# Altium PCB 智能插座2019_4_12.PcbDoc
Units mm, origin at the board's own origin, x right, y up, seen from the top; angles counter-clockwise.
Board outline 80 x 78.47 mm, 2 copper layers (Top Layer, Bottom Layer); 84 components, 62 nets, 274 pads, 96 vias.
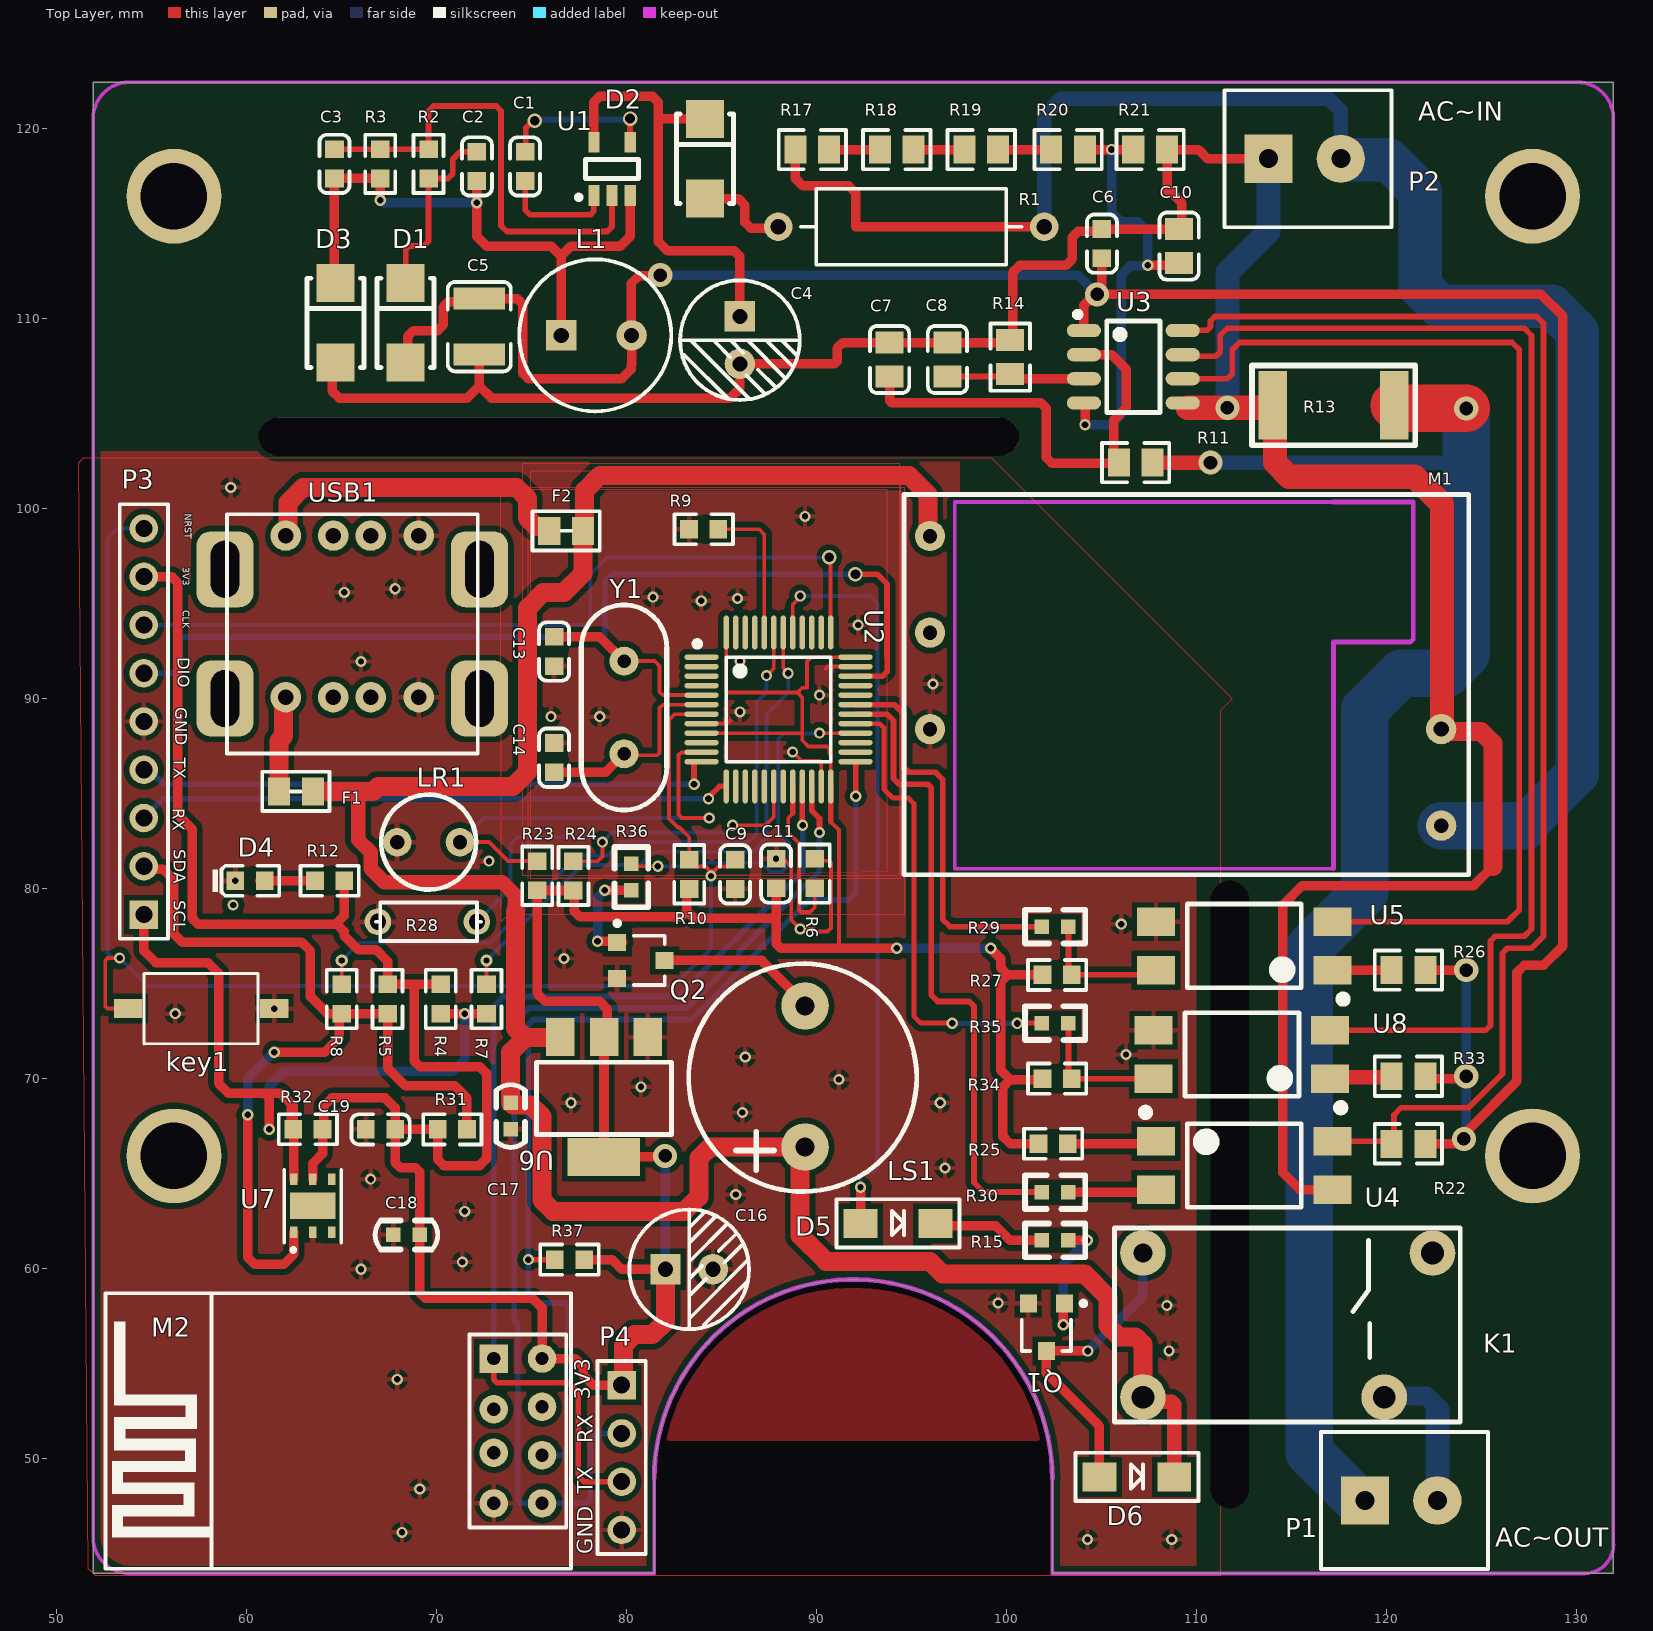
[diagram p0: Top Layer view]
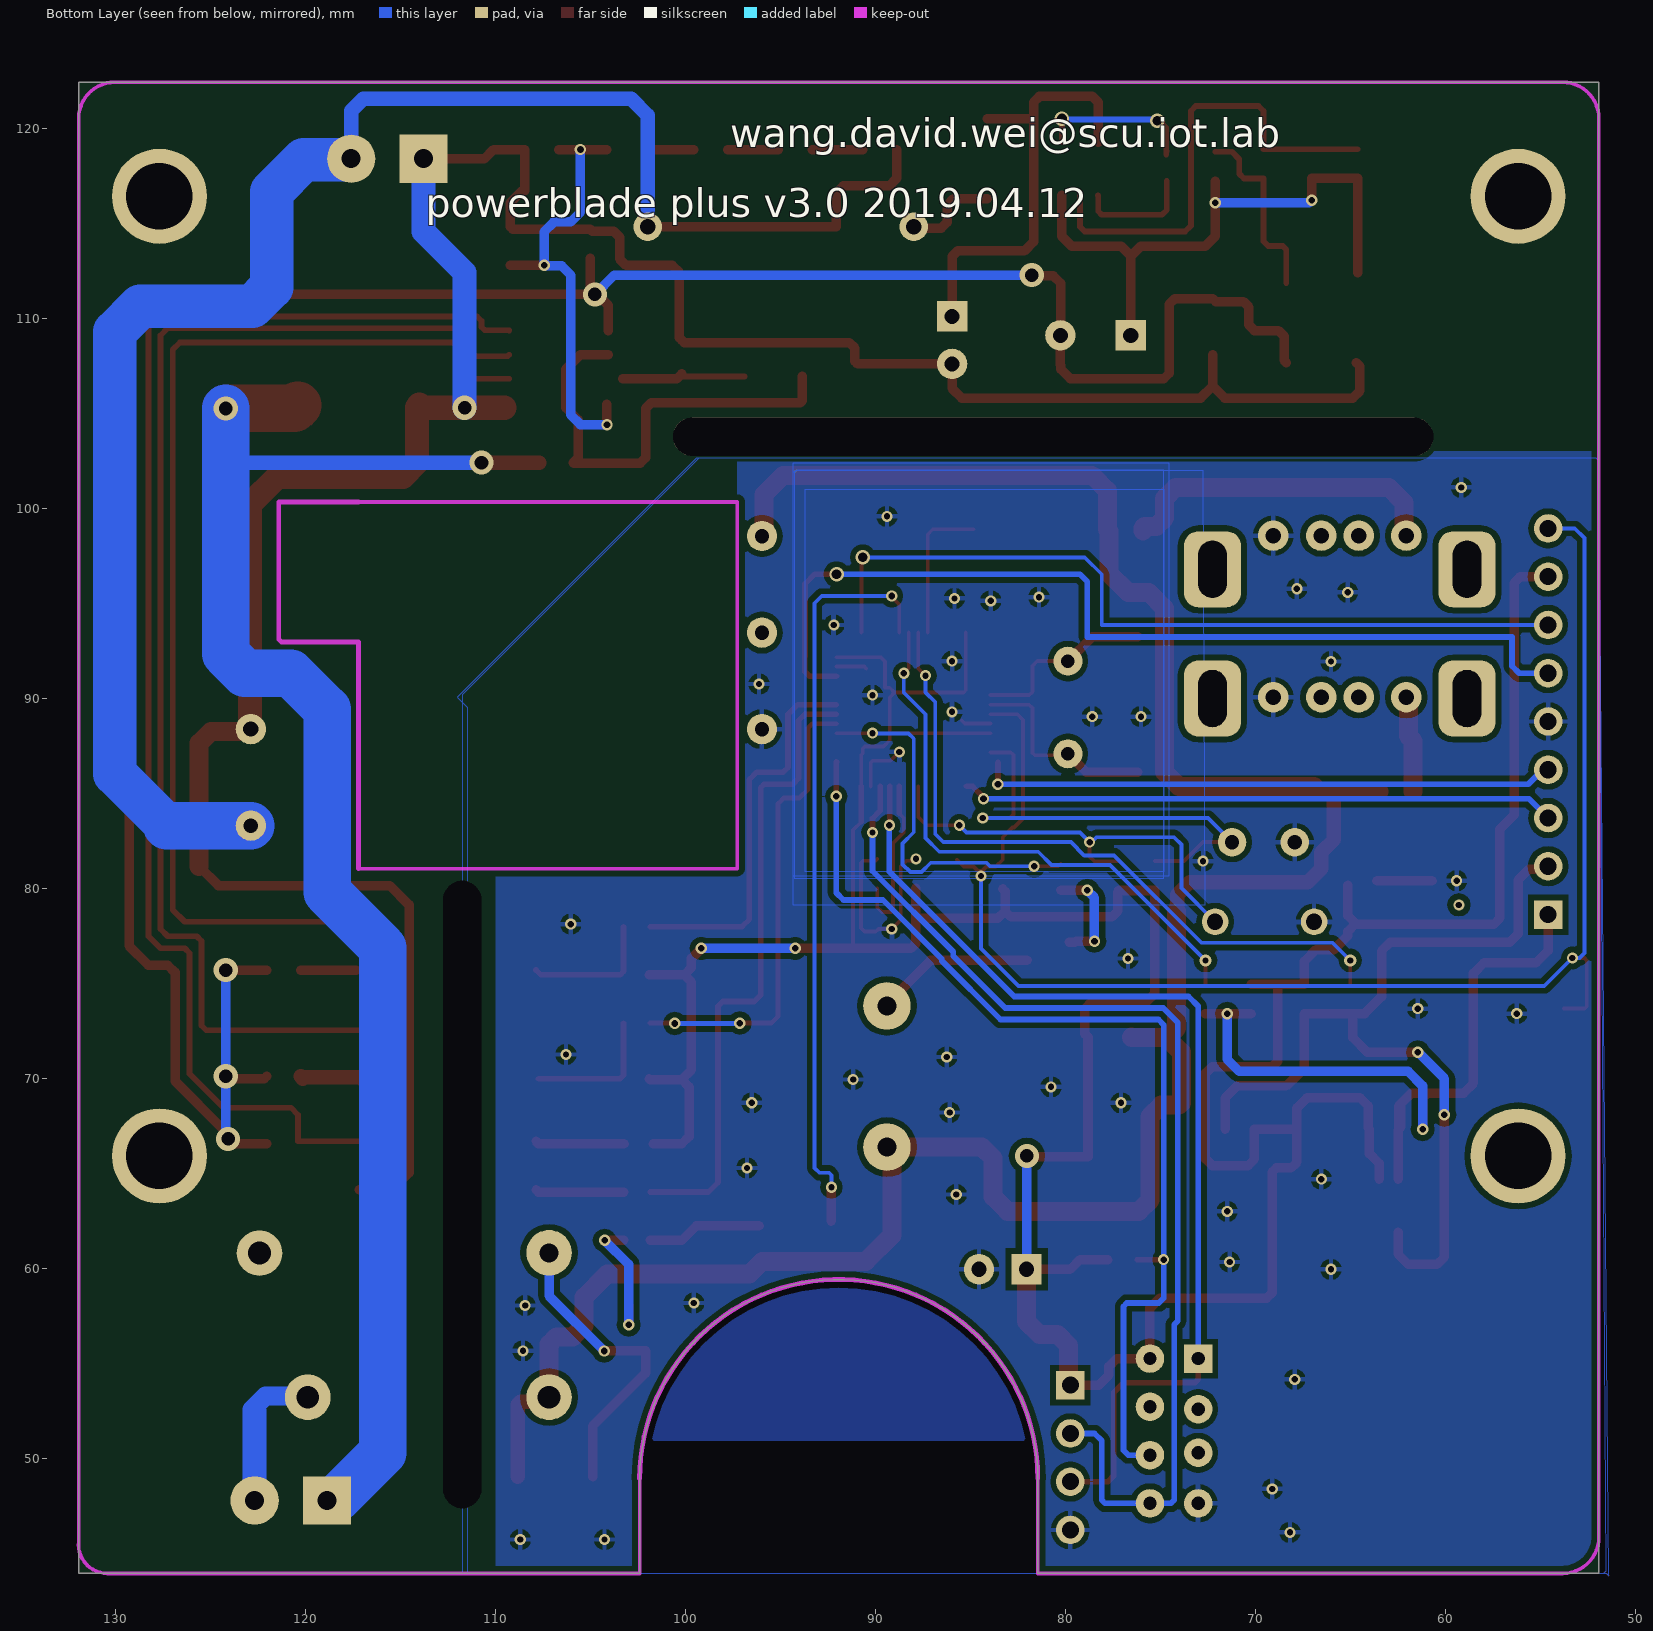
[diagram p1: Bottom Layer view, seen from below]

## Layer stack, top to bottom
Top Solder: solder mask 0.0102, Solder Resist, Dk 3.5
Top Layer: signal copper 0.0356
Dielectric1: dielectric 0.32, FR-4, Dk 4.8
Bottom Layer: signal copper 0.0356
Bottom Solder: solder mask 0.0102, Solder Resist, Dk 3.5

## Board outline
51.943,43.942 51.943,122.413 131.943,122.413 131.943,43.942 102.421,43.942 102.421,48.913 ccw(c91.944,48.931) 81.467,48.913 81.467,43.943 81.466,43.942

## Design rules (kind name [scope] priority, off if disabled: settings)
Clearance [All] p1: gap=0.203 ignorepadtopadclearanceinfootprint=FALSE
ComponentClearance [All] p1 off: gap=0.254 collisioncheckmode=3 verticalgap=0.254 showdistances=FALSE
FabricationTestPointUsage TestPointUsage [All] p1: valid=0 allowmultiple=FALSE
FabricationTestpoint Testpoint [All] p1: side=3 testpointundercomponent=TRUE minsize=1.016 maxsize=2.54 preferedsize=1.524 minholesize=0 maxholesize=1.016 preferedholesize=0.813 testpointgrid=0.025 allowsidetop=TRUE allowsidebottom=TRUE usegrid=TRUE gridtolerance=0
PolygonConnect [All] p1: connectstyle=Relief reliefconductorwidth=0.254 reliefentries=4 polygonreliefangle="90 Angle" airgapwidth=0.254
RoutingVias [All] p1 off: holewidth=0.711 width=1.27 viastyle="Through Hole" minholewidth=0.711 minwidth=1.27 maxholewidth=0.711 maxwidth=1.27
SolderMaskExpansion [All] p1: expansion=0.102
Width [All] p1: maxlimit=7.826 minlimit=0.2 preferedwidth=0.5
27 further rules are at their usual default settings.

## Components (designator, comment, footprint, x,y, rotation, side; value= is the part's Value field where it differs from the comment)
C1 "2.2μF/10V" LC-0603_C 74.676,117.983 r270 top value="100nF (104) ±10% 50V"
C2 "220nF" LC-0603_C 72.136,117.983 r90 top value="100nF (104) ±10% 50V"
C3 "470pF" LC-0603_C 64.643,118.118 r90 top value="100nF (104) ±10% 50V"
C4 "3.3μF/400V" CAP-ELECT-TH-6.3X7 85.979,108.839 r270 top value=2.2μF/400V
C5 "100μF" LC-1210_C 72.263,109.552 r90 top value="100nF (104) ±10% 50V"
C6 "0.1μF" LC-0603_C 105.029,113.919 r90 top value="100nF (104) ±10% 50V"
C7 "33nF" LC-0805_C 93.853,107.823 r90 top value="100nF (104) ±10% 50V"
C8 "33nF" LC-0805_C 96.901,107.823 r270 top value="100nF (104) ±10% 50V"
C9 "0.1μF" LC-0603_C 85.725,80.731 r90 top
C10 "33nF" LC-0805_C 109.093,113.792 r90 top value="100nF (104) ±10% 50V"
C11 "0.1μF" LC-0603_C 87.884,80.772 r270 top
C13 "20pF" LC-0603_C 76.2,92.456 r270 top
C14 "20pF" LC-0603_C 76.2,86.868 r90 top
C16 "1000μF/400V" CAP-ELECT-TH-6.3X7 83.312,59.944 r0 top value=2.2μF/400V
C17 "104" 0603C#1 73.946,68.158 r90 top
C18 "104" 0603C#2 68.58,61.722 r0 top
C19 "0.1μF" LC-0603_C 67.067,67.309 r0 top
D1 "1N4007" LC-SMA(DO-214AC)_S1 68.58,109.728 r270 top
D2 "1N4007" LC-SMA(DO-214AC)_S1 84.328,118.364 r270 top
D3 "US1J(600V 1A)" LC-SMA(DO-214AC)_S1 64.897,109.728 r270 top
D4 "POWER" LC-0603_LED_S1 60.198,80.391 r0 top value=红?
D5 "IN4148" 1206D#1 91.059,61.595 r90 top
D6 "" 1206D#2 103.632,48.26 r90 top
F1 "1.1A  自恢复保险丝" AFUSE 62.484,85.344 r180 top
F2 "1.1A  自恢复保险丝" AFUSE 76.708,99.06 r180 top
K1 "Relay-5V" SJ-S-105LMH 107.188,55.813 r0 top
key1 "SW" KEY-2 61.468,73.66 r180 top
L1 "1mH" L-10X14 78.367,109.093 r0 top
LR1 "光敏电阻" GUANGMIN 69.596,82.423 r180 top
LS1 "BUZZER 5V" BUZZER 89.408,70.104 r270 top
M1 "ACDC_THX208based" ACDC_THX208 124.333,80.772 r180 top
M2 "ESP-01&01S Module" "ESP-01&01S Module" 74.295,51.435 r90 top
P1 "Header" 3.81-2P 118.872,47.752 r0 top
P2 "Header" 3.81-2P 113.792,118.364 r0 top
P3 "Header 9" HDR1X9 54.61,78.613 r90 top
P4 "Header 4" HDR1X4 79.756,53.848 r270 top
Q1 "S8050" SOT-23 102.108,56.896 r180 top
Q2 "S8050" SOT-23 80.772,76.2 r270 top
R1 "39Ω/1W" R-1W-THT 94.996,114.808 r180 top
R2 "5.49KΩ" LC-0603_R 69.596,118.118 r270 top
R3 "4.99KΩ" LC-0603_R 67.056,118.118 r90 top
R4 "4.7KΩ" LC-0603_R 70.231,74.168 r270 top
R5 "4.7KΩ" LC-0603_R 67.437,74.168 r270 top
R6 "10KΩ" LC-0603_R 89.916,80.772 r270 top
R7 "100" LC-0603_R 72.644,74.168 r90 top
R8 "100" LC-0603_R 65.024,74.168 r90 top
R9 "10KΩ" LC-0603_R 84.074,98.886 r180 top
R10 "10KΩ" LC-0603_R 83.312,80.731 r270 top
R11 "1KΩ,1%" LC-0805_R 106.807,102.399 r0 top
R12 "1.5KΩ" LC-0603_R 64.389,80.391 r0 top
R13 "2mΩ/25A" R2512 117.221,105.41 r180 top
R14 "1KΩ,1%" LC-0805_R 100.203,107.95 r90 top
R15 "Res2" 0603 103.267,61.468 r180 top value=4.7K
R17 "470KΩ,1%" LC-0805_R 89.789,118.872 r180 top
R18 "470KΩ,1%" LC-0805_R 94.234,118.872 r180 top
R19 "470KΩ,1%" LC-0805_R 98.679,118.872 r180 top
R20 "470KΩ,1%" LC-0805_R 103.251,118.872 r180 top
R21 "1KΩ,1%" LC-0805_R 107.569,118.872 r0 top
R22 "1KΩ,1%" LC-0805_R 121.158,66.548 r0 top
R23 "10KΩ 1%" LC-0603_R 75.311,80.653 r270 top
R24 "10KΩ 1%" LC-0603_R 77.216,80.645 r270 top
R25 "2.2KΩ" LC-0603_R 102.463,66.548 r180 top
R26 "1KΩ,1%" LC-0805_R 121.157,75.692 r0 top
R27 "2.2KΩ" LC-0603_R 102.673,75.438 r180 top
R28 "MF52-10K   3950 1％" AXIAL-0.3 69.596,78.232 r180 top value=MF52-10K
R29 "0Ω/1W" 0603 103.267,77.978 r180 top
R30 "0Ω/1W" 0603 101.87,64.008 r0 top
R31 "10KΩ" LC-0603_R 70.845,67.309 r0 top
R32 "10KΩ" LC-0603_R 63.246,67.31 r180 top
R33 "1KΩ,1%" LC-0805_R 121.157,70.104 r0 top
R34 "2.2KΩ" LC-0603_R 102.673,69.977 r180 top
R35 "0Ω/1W" 0603 103.267,72.898 r180 top
R36 "4.7K" 0603 80.264,81.28 r270 top
R37 "4.7KΩ" LC-0603_R 77.011,60.452 r0 top
U1 "MP150" LC-SOT-23-5 79.248,117.856 r270 top
U2 "STM32F103C8T6" LC-LQFP-48_7x7x05P 88.011,89.408 r270 top
U3 "HLW8032" LC-SOP-8_150mil 106.68,107.442 r270 top
U4 "PC817" LC-SMD-4 112.522,65.405 r0 top
U5 "PC817" LC-SMD-4 112.522,76.962 r180 top
U6 "LM1117-3.3V" SOT-223/P2.3 78.867,69.342 r270 top
U7 "SHT1" SHT2X 63.501,61.887 r0 top
U8 "PC817" LC-SMD-4 112.395,71.247 r180 top
USB1 "2_USB" 2_USB 66.04,98.552 r180 top
Y1 "8M" 49/U_N 79.883,91.948 r270 top value="25MHz ±20ppm 20pF"

## Footprints (in the part's own frame and the unit in brackets; to place one, negate y for a bottom-side part, rotate by r counter-clockwise, add the part's x,y. Pads: shape width x height; smd on the part's side, far side on the other; paste and mask are expansions set on the pad)
2_USB [mm]
  rrect50% 3x4 hole 1.5 slot 3 at 90 deg: 0(-6.24,8.57) 0(-6.24,1.77) 0(7.16,8.57) 0(7.16,1.77)
  round 1.6 hole 0.8: 1(3.96,8.5) 2(-0.508,8.5) 3(1.46,8.5) 4(-3.04,8.5) 5(3.96,0) 6(-0.508,0) 7(1.46,0) 8(-3.04,0)
  silkscreen extent -6.14,-1.13 7.06,11.47
3.81-2P [mm]
  rect 2.54x2.54 hole 1: 1(0,0.025)
  round 2.54 hole 1: 2(3.81,0.025)
  silkscreen extent -2.31,-3.58 6.48,3.63
49/U_N [mil]
  round 60 hole 28: 1(0,0) 2(192,0)
  silkscreen extent -116,-88 308,89, body extent -117,-88 309,89, height 512
0603 [mil]
  rect 30x30 smd: 1(0,0) 2(55,0)
  silkscreen extent -35,-35 90,35
0603C#1 [mil]
  rect 30x30 smd mask+4: 1(21.61,1.26)
  rect 30x30 smd: 2(-33.39,1.26)
  silkscreen extent -71,-29 59,31
0603C#2 [mil]
  rect 30x30 smd: 1(21.61,1.26) 2(-33.39,1.26)
  silkscreen extent -71,-29 59,31
1206D#1 [mil]
  rect 60x70 smd: 1(30,-50) 2(30,-205)
  silkscreen extent -20,-255 80,0
1206D#2 [mil]
  rect 60x70 smd: 1(30,-50)
  rect 60x70 smd mask+4: 2(30,-205)
  silkscreen extent -20,-255 80,0
ACDC_THX208 [mm]
  round 1.6 hole 0.762: 1(1.45,-2.52) 3(28.35,-7.6) 4(28.35,-12.68)
  round 1.6 hole 0.8: 2(1.45,-7.6)
  round 1.6 hole 0.762 mask+0.102: 5(28.35,-17.76)
  silkscreen extent 0,-19.94 29.72,0.06
AFUSE [mm]
  rect 1.16x1.47 smd mask+0.102: 1(-1.017,0.254)
  rect 1.16x1.47 smd: 2(0.763,0.254)
  silkscreen extent -1.9,-0.78 1.64,1.29, body extent -1.12,-0.37 0.88,0.88, height 0.49
AXIAL-0.3 [mm] "Resistor; 2 Leads"
  round 1.4 hole 0.85: 1(-2.54,0) 2(2.667,0)
  silkscreen extent -2.77,-1.02 2.77,1.02
BUZZER [mm]
  round 2.5 hole 1 mask+0.102: 1(3.728,0)
  round 2.5 hole 1: 2(-3.703,0)
  silkscreen extent -5.93,-6.12 6.07,5.87
CAP-ELECT-TH-6.3X7 [mm]
  rect 1.6x1.6 hole 0.8: 1(-1.25,0)
  round 1.6 hole 0.8: 2(1.25,0)
  silkscreen extent -3.15,-3.15 3.15,3.15
"ESP-01&01S Module" [mm]
  rect 1.5x1.5 hole 0.7: 1(3.81,1.27)
  round 1.5 hole 0.7: 2(1.15,1.27) 3(-1.15,1.27) 4(-3.81,1.27) 5(3.81,-1.27) 6(1.27,-1.27) 7(-1.27,-1.27) 8(-3.81,-1.27)
  silkscreen extent -7.25,-2.79 7.25,21.71
GUANGMIN [mm]
  round 1.5 hole 0.75: 1(-1.651,0) 2(1.651,0)
  silkscreen extent -2.5,-2.5 2.5,2.5
HDR1X4 [mm] "Connector; Header; 4 Position"
  rect 1.5x1.5 hole 0.9: 1(0,0)
  round 1.5 hole 0.9: 2(2.54,0) 3(5.08,0) 4(7.62,0)
  silkscreen extent -1.27,-1.27 8.89,1.27
HDR1X9 [mm] "Connector; Header; 9 Position"
  rect 1.5x1.5 hole 0.9: 1(0,0)
  round 1.5 hole 0.9: 2(2.54,0) 3(5.08,0) 4(7.62,0) 5(10.16,0) 6(12.7,0) 7(15.24,0) 8(17.78,0) 9(20.32,0)
  silkscreen extent -1.27,-1.27 21.59,1.27
KEY-2 [mm]
  rect 1.5x1 smd: 1(-0.005,-0.001) 2(7.685,-0.001)
  silkscreen extent 0.85,-1.85 6.85,1.86
L-10X14 [mm]
  rect 1.6x1.6 hole 0.8: 1(-1.786,0)
  round 1.6 hole 0.8: 2(1.913,0)
  silkscreen extent -4,-4 4,4
LC-0603_C [mm]
  rect 0.93x0.98 smd: 1(-0.77,0) 2(0.77,0)
  silkscreen extent -1.54,-0.79 1.54,0.79, body extent -0.8,-0.4 0.8,0.4, height 0.3
LC-0603_LED_S1 [mm]
  rect 0.93x0.98 smd: A(0.77,0) K(-0.77,0)
  silkscreen extent -1.97,-0.79 1.53,0.79, body extent -0.8,-0.4 0.8,0.4, height 0.6
LC-0603_R [mm]
  rect 0.93x0.98 smd: 1(-0.77,0) 2(0.77,0)
  silkscreen extent -1.53,-0.79 1.54,0.79, body extent -0.85,-0.4 0.85,0.4, height 0.56
LC-0805_C [mm]
  rect 1.16x1.47 smd: 1(-0.89,0) 2(0.89,0)
  silkscreen extent -1.77,-1.04 1.77,1.04, body extent -1,-0.62 1,0.63, height 0.77
LC-0805_R [mm]
  rect 1.16x1.47 smd: 1(-0.89,0) 2(0.89,0)
  silkscreen extent -1.77,-1.03 1.77,1.04, body extent -1,-0.62 1,0.63, height 0.49
LC-1210_C [mm]
  rect 1.16x2.72 smd: 1(-1.475,0) 2(1.475,0)
  silkscreen extent -2.36,-1.66 2.35,1.66, body extent -1.6,-1.25 1.6,1.25, height 1.3
LC-LQFP-48_7x7x05P [mm]
  oval 0.28x1.8 smd: 1(-2.75,-4.05) 2(-2.25,-4.05) 3(-1.75,-4.05) 4(-1.25,-4.05) 5(-0.75,-4.05) 6(-0.25,-4.05) 7(0.25,-4.05) 8(0.75,-4.05) 9(1.25,-4.05) 10(1.75,-4.05) 11(2.25,-4.05) 12(2.75,-4.05) 25(2.75,4.05) 26(2.25,4.05) 27(1.75,4.05) 28(1.25,4.05) 29(0.75,4.05) 30(0.25,4.05) 31(-0.25,4.05) 32(-0.75,4.05) 33(-1.25,4.05) 34(-1.75,4.05) 35(-2.25,4.05) 36(-2.75,4.05)
  oval 1.8x0.28 smd: 13(4.05,-2.75) 14(4.05,-2.25) 15(4.05,-1.75) 16(4.05,-1.25) 17(4.05,-0.75) 18(4.05,-0.25) 19(4.05,0.25) 20(4.05,0.75) 21(4.05,1.25) 22(4.05,1.75) 23(4.05,2.25) 24(4.05,2.75) 37(-4.05,2.75) 38(-4.05,2.25) 39(-4.05,1.75) 40(-4.05,1.25) 41(-4.05,0.75) 42(-4.05,0.25) 43(-4.05,-0.25) 44(-4.05,-0.75) 45(-4.05,-1.25) 46(-4.05,-1.75) 47(-4.05,-2.25) 48(-4.05,-2.75)
  silkscreen extent -3.6,-4.42 2.75,2.75
LC-SMA(DO-214AC)_S1 [mm]
  rect 2x2 smd: 1(2.076,-0.194) 2(-2.124,-0.194)
  silkscreen extent -2.37,-1.69 2.33,1.31
LC-SMD-4 [mm]
  rect 2x1.5 smd: 1(-4.65,1.27) 2(-4.65,-1.27) 3(4.65,-1.27) 4(4.65,1.27)
  silkscreen extent -5.4,-2.2 3,3, body extent -5.02,-2.42 5.01,2.42, height 3.9
LC-SOP-8_150mil [mm]
  oval 0.7x1.8 smd: 1(-1.905,-2.6) 2(-0.635,-2.6) 3(0.635,-2.6) 4(1.905,-2.6) 5(1.905,2.6) 6(0.635,2.6) 7(-0.635,2.6) 8(-1.905,2.6)
  silkscreen extent -2.9,-3.07 2.4,1.4, body extent -2.5,-3.1 2.5,3.1, height 1.75
LC-SOT-23-5 [mm]
  rect 1.1x0.6 smd: 1(1.4,-0.95) 2(1.4,0) 3(1.4,0.95) 4(-1.4,0.95) 5(-1.4,-0.95)
  silkscreen extent -0.5,-1.87 1.62,1.4
R2512 [mm]
  rect 1.5x3.6 smd: 1(-3.2,0) 2(3.2,0)
  silkscreen extent -4.3,-2.1 4.3,2.1
R-1W-THT [mm]
  round 1.5 / inner oval 1.5x2 / far side round 1.5 hole 0.8: 1(-7,0)
  round 1.5 hole 0.8: 2(7,0)
  silkscreen extent -5.8,-2 5.8,2
SHT2X [mm]
  rect 2.4x1.4 smd: 0(0,1.4)
  rect 0.4x0.6 smd: 1(-1,0) 2(0,0) 3(1,0) 4(1,2.8) 5(0,2.8) 6(-1,2.8)
  silkscreen extent -1.5,-0.95 1.5,3.3
SJ-S-105LMH [mm]
  round 2.4 hole 1: 1(0,5)
  round 2.4 hole 1.2 mask+0.102: 2(0,-2.6)
  round 2.4 hole 1.2: 3(15.24,4.984) 4(12.7,-2.6)
  silkscreen extent -1.5,-3.9 16.7,6.3
SOT-23 [mm] "SOT-23; 3 Leads; Body 3.0 x 2.6 mm, inc. leads (LxW max)"
  rect 0.9x0.95 smd: 1(-0.95,-1.25) 2(0.95,-1.25) 3(0,1.25)
  silkscreen extent -2.08,-1.37 1.3,1.25
SOT-223/P2.3 [mil]
  rect 79x59 smd: 1(-111,89.1) 2(-111,-1.45)
  rect 79x150 smd: 2(137,-1.9)
  rect 79x59 smd mask+4: 3(-111,-92)
  silkscreen extent -59,-141 91,139

## Part data
C1 C2 C3 C5 C6 C7 C8 C10: library part CAP, "贴片电容"
C4 C16: library part "Cap Pol1", "直插电解电容", LatestRevisionDate=17-Jul-2002, LatestRevisionNote="Re-released for DXP Platform.", PackageReference=RB7.6-15, Published=8-Jun-2000, Publisher="Altium Limited"
C9 C11 C13 C14 C19: library part Cap, "贴片电容", 型号=1, 封装=08
C17 C18: library part CAP, "Capacitor"
D1 D2 D3: library part "Diode 1N5408", "贴片二极管", ComponentLink1Description="Manufacturer Link", ComponentLink1URL=http://www.irf.com/, DatasheetDocument=Aug-1984, LatestRevisionDate=17-Jul-2002, LatestRevisionNote="Re-released for DXP Platform.", PackageReference=DO-201AD, Published=8-Jun-2000, Publisher="Altium Limited"
D4: library part LED1, "发光二极管"
D5 D6: library part Diode, "Default Diode", PackageDocument=Sep-1996, Code_JEDEC=DO-214-AB, LatestRevisionDate=17-Jul-2002, LatestRevisionNote="Re-released for DXP Platform.", PackageReference=SMC, Published=8-Jun-2000, Publisher="Altium Limited"
F1 F2: library part "Fuse 2", "Fuse", LatestRevisionDate=17-Jul-2002, LatestRevisionNote="Re-released for DXP Platform.", PackageReference=PIN-W2/E2.8, Published=8-Jun-2000, Publisher="Altium Limited"
K1: library part SJ-S-105LMH, "Single-Pole Dual-Throw Relay", LatestRevisionDate=17-Jul-2002, LatestRevisionNote="Re-released for DXP Platform.", PackageReference=MODULE5B, Published=24-Mar-1999, Publisher="Altium Limited"
key1: "Switch", LatestRevisionDate=17-Jul-2002, LatestRevisionNote="Re-released for DXP Platform.", PackageReference=SPST-2, Published=24-Mar-1999, Publisher="Altium Limited"
L1: library part IND_8, "直插绕线电感", AtherosDescription="IND,SMT,SHIELDING CHOKE,10uH,7.3x7.3", ATHEROS KEY=078-100LM-000, CISPartType=Inductor\Ferrite, OriginalSymbolOrigin=(0,0)
LS1: library part Bell, "Electrical Bell", LatestRevisionDate=17-Jul-2002, LatestRevisionNote="Re-released for DXP Platform.", PackageReference=PIN2, Published=24-Mar-1999, Publisher="Altium Limited"
M1: library part ACDC, "THX208Based"
P1 P2: library part "Header 2", "Header, 2-Pin", LatestRevisionDate=17-Jul-2002, LatestRevisionNote="Re-released for DXP Platform.", Publisher="Altium Limited"
P3: "Header, 9-Pin", LatestRevisionDate=17-Jul-2002, LatestRevisionNote="Re-released for DXP Platform.", Publisher="Altium Limited"
P4: "Header, 4-Pin", LatestRevisionDate=17-Jul-2002, LatestRevisionNote="Re-released for DXP Platform.", Publisher="Altium Limited"
Q1 Q2: library part NPN, "NPN Bipolar Transistor", Code_JEDEC=TO-226-AA, LatestRevisionDate=17-Jul-2002, LatestRevisionNote="Re-released for DXP Platform.", PackageReference=TO-226, Published=8-Jun-2000, Publisher="Altium Limited"
R1 R2 R3 R4 R5 R6 R7 R8 R9 R10 R11 R12 R13 R14 R17 R18 R19 R20 R21 R22 R23 R24 R25 R26 R27 R29 R30 R31 R32 R33 R34 R35: library part 电阻, "贴片电阻", 型号=1
R15: "Resistor", LatestRevisionDate=17-Jul-2002, LatestRevisionNote="Re-released for DXP Platform.", PackageReference=AXIAL-0.4, Published=8-Jun-2000, Publisher="Altium Limited"
R28: library part "Res Adj2", "Variable Resistor", LatestRevisionDate=17-Jul-2002, LatestRevisionNote="Re-released for DXP Platform.", PackageReference=AXIAL-0.6, Published=8-Jun-2000, Publisher="Altium Limited", Set Position=0.5
R36: library part Res2, "Resistor", LatestRevisionDate=17-Jul-2002, LatestRevisionNote="Re-released for DXP Platform.", PackageReference=0805, Published=8-Jun-2000, Publisher="Altium Limited"
R37: library part "0805 62KΩ (6202) 1%", "贴片电阻", Package=0402, SuppliersPartNumber=C17783, ComponentLink1Description=供应, ComponentLink1URL=http://www.szlcsc.com/product/details_18471.html, Supplier=LC
U1 U3: "IC"
U2: library part STM32F103CBT6, "IC", ComponentLink1Description="Manufacturer Link", ComponentLink1URL=www.st.com/stm32, ComponentLink2Description=Datasheet, ComponentLink2URL=http://www.st.com/stonline/products/literature/ds/13587.pdf, DatasheetVersion="rev6, Mar-2008", PackageDescription="48-Pin Low-Profile Quad Flat Pack, 7 x 7 mm Body, 0.5 mm Pitch (LQFP48)", PackageReference=LQFP48, PackageVersion=Mar-2008, Published=30-May-2008, Publisher="Altium Limited", 型号=STM32F103CB, 封装=LQFP
U4 U5 U8: library part PS2501L-1-F3-A, "IC"
U6: library part 1117
U7: library part SHT21
Y1: library part XTAL_1, "晶振（直插）", LatestRevisionDate=17-Jul-2002, LatestRevisionNote="Re-released for DXP Platform.", PackageReference=R38, Published=8-Jun-2000, Publisher="Altium Limited"

## Free pads (board coordinates)
  round 5 hole 3.5: 0(56.193,65.913) 0(56.193,116.413) 0(127.693,65.913) 0(127.693,116.413)
  oval 40x2 hole 2 slot 40 at 0 deg unplated paste+0: 0(80.659,103.759)
  oval 2x10 hole 2 slot 33.02 at 90 deg unplated paste+0: 0(111.76,63.881)

## Via types
v1: diameter 0.584, hole 0.33, Top Layer to Bottom Layer, 60 vias
v2: diameter 0.6, hole 0.35, Top Layer to Bottom Layer, 21 vias
v3: diameter 1.27, hole 0.711, Top Layer to Bottom Layer, 9 vias
v4: diameter 0.762, hole 0.508, Top Layer to Bottom Layer, 4 vias
v5: diameter 0.635, hole 0.33, Top Layer to Bottom Layer, 2 vias

## Nets (pads, with @x,y where several pads share a name; then routed paths per layer and width w, separated by ;. In a path a pad name is that pad's centre, name@x,y a point inside that pad or via, vN(x,y) a via of type N, cw(c..) or ccw(c..) an arc to the next point about the centre after c; other vN are vias at no path point)
+3.3V: C11.2 C16.1 C18.1 C19.2 M2.5 P3.8 P4.1 R4.1 R5.1 R10.2 R12.2 R23.2 R24.2 R25.2 R27.2 R31.1 R32.1 R34.2 R37.2 U2.9 U2.24 U2.36 U2.48 U6.2 U7.5 | length 206.3
  Top Layer w0.2: U2.9 89.261,88.158 ; U2.48 85.261,90.414 85.378,90.297 89.007,90.297 ; 90.761,83.483 91.186,83.058 91.186,76.835 ; U2.24 90.761,86.83 90.756,86.835 90.756,87.005 90.679,87.082 90.679,87.344 90.562,87.461 89.585,87.461 89.261,87.785 89.261,88.158 ; U2.36 89.745,92.158 89.515,91.928 89.515,90.551 89.261,90.551 89.007,90.297 ; 89.007,90.297 89.261,90.043 89.261,88.158
  Top Layer w0.279: 90.761,83.483 U2.24
  Top Layer w0.5: P3.8 54.625,96.378 56.095,96.378 56.388,96.085 56.388,83.871 57.15,83.109 57.15,78.424 57.469,78.105 64.738,78.105 ; U7.5 63.5,64.688 63.5,65.517 64.016,66.033 R32.1 64.09,67.384 64.09,68.55 64.501,68.961 67.31,68.961 67.837,68.434 C19.2 ; R12.2@65.159,80.167 65.159,78.559 64.738,78.137 65.151,77.724 65.151,77.504 65.884,76.772 66.819,76.772 67.437,76.153 R5.1 ; R5.1@67.556,74.938 68.834,74.938 ; C18.1 69.129,65.071 68.922,65.278 68.13,65.278 67.837,65.571 C19.2 ; 69.422,58.42 75.061,58.42 75.565,57.916 M2.5 77.312,55.245 77.724,54.833 77.724,54.38 78.256,53.848 P4.1 ; R4.1 68.834,74.938 ; R24.2 77.273,79.818 77.273,78.779 77.566,78.486 82.892,78.486 83.185,78.779 ; R37.2 79.248,60.452 79.756,59.944 C16.1 ; U6.2@78.83,65.874 78.819,65.862 81.991,65.862 v3(82.042,65.913) ; R10.2 83.185,79.834 83.185,78.779 ; C11.2 87.884,78.424 ; v2(94.234,76.835) 91.186,76.835 88.138,76.835 87.884,77.089 87.884,78.424 ; v2(99.187,76.835) 99.187,76.808 99.695,76.3 99.695,75.819 100.076,75.438 ; R25.2 100.203,66.548 99.822,66.929 99.822,69.547 100.203,69.928 ; R34.2 101.854,69.928 100.203,69.928 ; R27.2 100.076,75.438 ; C19.2 R31.1 70.075,65.727 70.397,65.405 72.278,65.405 72.644,65.771 72.644,70.248 72.28,70.612 69.127,70.612 68.834,70.905 68.834,74.938 ; 83.185,78.779 83.211,78.779 83.566,78.424 87.884,78.424 ; 100.076,75.438 99.695,75.057 99.695,70.436 100.203,69.928
  Top Layer w0.508: C18.1 69.129,58.713 69.422,58.42 ; R24.2 77.212,79.879 75.315,79.879 R23.2 75.311,74.466 75.736,74.041 78.605,74.041 78.994,73.652 78.994,72.325 78.83,72.161 U6.2@78.83,65.874
  Top Layer w1: P4.1 79.847,53.939 79.847,55.929 80.433,56.515 81.387,56.515 82.062,57.19 C16.1
  Bottom Layer w0.5: v3(82.042,65.913) 82.062,65.893 C16.1 ; v2(94.234,76.835) v2(99.187,76.835)
+5V: C17.1 D6.2 F1.1 F2.1 K1.2 LS1.1 M1.5 U6.3 | length 132.3
  Top Layer w0.762: 65.786,85.09 65.884,84.992 65.884,82.55 66.548,81.886 66.548,81.026 67.261,80.313 73.484,80.313 74.135,79.662 74.135,79.134 74.168,79.101 74.168,78.807 ; K1.2@107.188,53.28 107.501,52.967 108.706,52.967 108.839,52.834 D6.2
  Top Layer w1: F1.1 65.786,85.09 66.675,85.09 66.929,85.344 74.027,85.344 74.803,86.12 74.803,94.742 75.629,95.567 76.722,95.567 77.725,96.571 F2.1 77.805,98.886 77.805,100.919 78.613,101.727 94.869,101.727 95.868,100.728 95.868,98.647 M1.5 ; 74.168,78.807 74.168,72.639 74.676,72.131 ; U6.3 76.53,72.131 74.676,72.131 ; K1.2@107.188,53.28 107.188,56.007 106.807,56.388 105.932,56.388 105.346,56.974 105.346,58.483 104.14,59.69 96.647,59.69 95.973,60.364 90.512,60.364 89.154,61.722 89.154,66.122 88.9,66.376 84.406,66.376 83.82,65.79 83.82,63.754 83.058,62.992 76.151,62.992 75.565,63.578 75.565,67.994 74.979,68.58 74.041,68.58 C17.1 73.914,71.369 74.676,72.131
A+5V: C5.2 C6.1 D1.1 L1.2 R22.2 R26.2 R33.2 U3.1 | length 138.3
  Top Layer w0.5: D1.1 68.509,107.775 68.509,109.054 68.802,109.347 70.065,109.347 70.358,109.64 70.358,110.578 70.651,110.871 72.107,110.871 C5.2 74.256,111.027 74.549,110.734 74.549,107.1 74.842,106.807 79.756,106.807 80.264,107.315 80.264,107.527 80.28,107.543 L1.2 ; L1.2@80.264,109.347 80.264,111.836 80.659,112.231 81.751,112.231 v3(81.788,112.268) ; U3.1 104.08,110.684 v3@104.712,111.316 ; v3(104.775,111.252) 128.143,111.252 129.286,110.109 129.286,76.962 128.27,75.946 127.254,75.946 126.873,75.565 126.873,69.85 124.333,67.31 124.333,67.264 124.079,67.01 v3(124.079,66.802) 123.825,66.548 R22.2 ; v3@105.029,111.633 C6.1 ; R33.2 122.174,69.977 124.079,69.977 v3(124.206,70.104) ; R26.2 v3(124.206,75.692)
  Bottom Layer w0.5: v3(81.788,112.268) 103.759,112.268 v3(104.775,111.252) ; v3(124.079,66.802) 124.206,66.929 v3(124.206,70.104) v3(124.206,75.692)
AC220V-L: M1.1 P2.2 R1.1 R17.2 | length 92
  Top Layer w0.5: R17.2 88.899,117.349 89.281,116.967 91.694,116.967 92.075,116.586 92.075,114.808 R1.1
  Bottom Layer w0.762: R1.1 101.996,120.665 102.87,121.539 116.967,121.539 117.602,120.904 P2.2
  Bottom Layer w2.286: P2.2 117.651,118.341 120.096,118.341 121.793,116.644 121.793,111.633 122.809,110.617 128.709,110.617 130.048,109.278 130.048,86.029 127.311,83.292
  Bottom Layer w2.5: M1.1 127.311,83.292
AC220V-N: C4.2 C5.1 C6.2 C7.2 C8.1 C10.2 D3.1 M1.2 P2.1 R13.2 R14.2 R21.2 U3.5 U4.3 | length 147.8
  Top Layer w0.5: D3.1 64.516,107.465 64.516,106.172 64.897,105.791 71.628,105.791 72.263,106.426 ; C5.1 72.263,106.426 ; R21.2 108.458,116.713 108.585,116.713 109.22,116.078 109.22,114.809 C10.2 109.086,114.689 C6.2 104.924,114.584 103.789,114.584 103.474,114.269 103.474,113.118 103.132,112.776 100.711,112.776 100.33,112.395 100.33,108.967 R14.2 100.076,108.713 C8.1 C7.2 91.389,108.713 91.097,108.42 91.097,107.734 90.952,107.589 C4.2 85.979,106.299 85.471,105.791 72.898,105.791 72.263,106.426 ; R21.2 110.109,118.872 110.592,118.389 P2.1 ; v3@111.379,105.283 v3(111.633,105.283) ; R13.2@113.894,105.283 R13.2 R13.2@114.046,105.435 ; U4.3 115.443,64.135 114.554,65.024 114.554,79.121 115.57,80.137 124.587,80.137 125.603,81.153
  Top Layer w1: M1.2 122.998,88.257 124.976,88.257 125.603,87.63 125.603,81.153
  Top Layer w1.27: U3.5@109.534,105.283 v3@111.379,105.283 ; v3(111.633,105.283) R13.2@113.894,105.283 ; R13.2 114.136,105.295 114.136,102.399 114.88,101.655 121.484,101.655 122.936,100.203 M1.2@122.936,88.392 ; R13.2@114.021,105.46 R13.2@114.046,105.435
  Bottom Layer w1.27: v3(111.633,105.283) 111.633,112.395 113.792,114.554 P2.1
ADC_IN1: LR1.1 R23.1 U2.11 | length 24.2
  Top Layer w0.2: LR1.1 72.771,82.423 73.771,81.423 R23.1 ; U2.11 83.946,87.143 82.888,87.143 82.75,87.005 82.75,83.874 82.931,83.693 v1(84.367,83.693)
  Bottom Layer w0.2: LR1.1 72.517,83.693 v1(84.367,83.693)
ADC_IN8: R24.1 R28.1 U2.18 | length 23.5
  Top Layer w0.2: R24.1 78.486,81.415 78.74,81.669 v1(78.74,82.423) ; v1(85.598,83.312) 87.332,83.312 87.761,83.741 U2.18
  Bottom Layer w0.2: R28.1 73.914,80.01 73.914,82.296 74.295,82.677 78.382,82.677 78.636,82.423 v1(78.74,82.423) 79.248,82.931 85.217,82.931 v1(85.598,83.312)
BOOT0: R9.1 U2.44 | length 7.7
  Top Layer w0.2: R9.1 86.995,98.886 87.261,98.62 U2.44
CTL_PIN: D5.1 U2.41 | length 39.5
  Top Layer w0.2: U2.41 88.761,94.921 89.154,95.314 v2(89.154,95.377)
  Top Layer w0.5: D5.1@92.329,62.484 v1(92.329,64.262)
  Bottom Layer w0.2: v2(89.154,95.377) 92.837,95.377 93.218,94.996 93.218,65.278 92.964,65.024 92.456,65.024 92.329,64.897 92.329,64.862 ; v1(92.329,64.262) 92.329,64.862
DGND: C9.1 C11.1 C13.2 C14.2 C16.2 C17.2 C18.2 C19.1 D4.K key1.1 LR1.2 M1.3 M2.4 P3.5 P4.4 Q1.2 Q2.2 R6.1 R9.2 R28.2 U2.8 U2.23 U2.35 U2.47 U5.3 U6.1 U7.2 U8.3 USB1.4 USB1.8 | length 16.8
  Top Layer w0.203: U2.8 85.297,88.658 85.471,88.832 ; v1(87.884,81.542) 87.981,81.445 88.375,81.445 88.679,81.141 88.679,78.326 v1(89.154,77.851) 89.854,77.851 89.994,77.711 90.591,77.711 90.781,77.901 90.781,81.326 90.662,81.445 90.013,81.445 R6.1 ; v1(88.755,87.166) 89.216,86.705 90.17,86.705 90.261,86.614 U2.23 ; 90.5,91.567 90.591,91.658 U2.35
  other v1: 104.267,45.72 108.706,45.72 68.199,46.101 69.129,48.387 67.945,54.151 108.561,55.651 108.445,58.039 99.568,58.166 66.04,59.944 71.374,60.325 71.501,62.992 85.761,63.881 66.548,64.687 96.774,65.278 86.106,68.199 77.089,68.707 96.52,68.707 80.772,69.547 91.186,69.928 86.261,71.12 106.299,71.247 56.261,73.398 61.473,73.661 76.722,76.3 106.045,78.105 59.428,80.391 72.771,81.423 76.041,89.027 78.605,89.027 85.979,89.281 90.17,90.158 96.139,90.741 66.04,91.928 85.979,91.948 92.202,93.853 83.946,95.123 85.852,95.25 81.407,95.314 65.159,95.567 67.837,95.758 89.408,99.568 59.182,101.092
I2C1_SCL: P3.1 R4.2 R7.1 R32.2 U7.6 | length 41.8
  Top Layer w0.5: P3.1 54.61,76.708 55.245,76.073 57.992,76.073 58.547,75.518 58.547,69.723 59.055,69.215 60.96,69.215 ; v2(61.214,67.31) 61.214,68.961 60.96,69.215 ; U7.6 62.488,64.7 62.488,67.297 62.357,67.429 62.357,68.669 ; R32.2@62.5,67.286 R32.2 62.476,68.55 62.357,68.669 ; R4.2 v2(71.501,73.398) R7.1 ; 60.96,69.215 61.811,69.215 62.357,68.669
  Bottom Layer w0.5: v2(61.214,67.31) 61.214,69.596 61.976,70.358 70.866,70.358 71.501,70.993 v2(71.501,73.398)
I2C1_SDA: P3.2 R5.2 R8.1 R31.2 U7.1 | length 48.8
  Top Layer w0.5: P3.2 54.776,80.987 55.641,80.987 56.193,80.435 56.193,77.597 56.64,77.15 62.931,77.15 63.373,76.708 63.373,74.295 64.27,73.398 R8.1@64.897,73.398 ; v2(60.071,68.072) 60.071,60.579 60.452,60.198 61.976,60.198 62.501,60.723 U7.1 ; v2(61.468,71.374) 64.135,71.374 64.897,72.136 R8.1@64.897,73.398 ; R31.2 71.615,68.961 70.98,69.596 68.386,69.596 67.437,70.545 R5.2 R8.1 R8.1@64.897,73.398
  Bottom Layer w0.5: v2(60.071,68.072) 60.071,69.977 v2(61.468,71.374)
L_LINE: K1.3
L_OUT: K1.4 P1.2 | length 8.6
  Bottom Layer w1: K1.4@120.156,53.012 119.888,53.28 122.107,53.28 122.809,52.578 122.682,52.451 ; P1.2 P1.2@122.809,47.904
  Bottom Layer w1.27: P1.2 122.682,52.451
NetC1_1: C1.1 U1.4 | length 8.4
  Top Layer w0.3: C1.1@74.676,118.793 C1.1@74.696,118.773 ; C1.1@74.716,118.606 74.716,120.015 75.097,120.396 v4(75.184,120.396) ; U1.4 v4(80.198,120.503)
  Bottom Layer w0.3: v4(75.184,120.396) 75.237,120.449 80.145,120.449 v4(80.198,120.503)
NetC1_2: C1.2 U1.1 | length 6.1
  Top Layer w0.3: C1.2 74.676,115.697 74.93,115.443 78.105,115.443 78.281,115.619 78.281,116.439 U1.1
NetC2_1: C2.1 C3.1 D3.2 L1.1 R3.1 U1.3 | length 31.5
  Top Layer w0.5: D3.2@64.643,112.395 C3.1 R3.1 v2(67.056,116.205) ; C2.1 v2(72.136,116.078) 72.136,114.3 72.644,113.792 76.041,113.792 76.565,113.268 ; L1.1@76.565,109.347 76.565,113.268 ; U1.3 80.198,114.304 79.686,113.792 77.089,113.792 76.565,113.268
  Bottom Layer w0.5: v2(67.056,116.205) 67.183,116.078 v2(72.136,116.078)
NetC2_2: C2.2 D1.2 R2.2 | length 10
  Top Layer w0.3: D1.2 68.386,113.598 68.58,113.792 69.342,113.792 69.596,114.046 R2.2 70.612,117.348 70.866,117.602 70.866,118.364 71.255,118.753 C2.2
NetC3_2: C3.2 R2.1 R3.2 U1.2 | length 24.8
  Top Layer w0.3: C3.2 R3.2 R2.1 69.596,120.904 69.85,121.158 73.152,121.158 73.406,120.904 73.406,114.862 73.714,114.554 78.994,114.554 79.248,114.808 U1.2
NetC4_1: C4.1 D2.2 U1.5 | length 23.3
  Top Layer w0.5: U1.5 78.3,119.258 78.3,121.373 78.593,121.666 81.388,121.666 81.681,121.373 81.681,120.503 ; D2.2 84.119,120.503 81.681,120.503 ; C4.1 85.979,113.245 85.686,113.538 82.169,113.538 81.681,114.026 81.681,120.503
NetC7_1: C7.1 R11.1 U3.2 | length 24.1
  Top Layer w0.5: C7.1 93.853,105.664 93.98,105.537 101.815,105.537 102.108,105.244 102.108,102.655 102.401,102.362 105.88,102.362 R11.1 105.664,102.652 105.664,104.648 106.299,105.283 106.299,107.315 105.537,108.077 U3.2
NetC8_2: C8.2 R14.1 U3.3 | length 6.4
  Top Layer w0.3: C8.2 R14.1@100.076,106.933
  Top Layer w0.5: R14.1 100.456,106.807 U3.3@103.318,106.807
NetC10_1: C10.1 R20.1 R21.1 U3.4 | length 23.9
  Top Layer w0.5: v2(104.14,104.394) U3.4@104.14,105.477 ; R20.1 R21.1 ; v2(107.442,112.776) C10.1@109.22,112.776
  Bottom Layer w0.5: v2(104.14,104.394) 105.537,104.394 106.045,104.902 106.045,112.268 106.534,112.757 107.423,112.757 v2(107.442,112.776) 107.442,114.554 106.934,115.062 106.045,115.062 105.537,115.57 v2(105.537,118.872)
NetD2_1: D2.1 R1.2 | length 5.1
  Top Layer w0.5: D2.1 85.896,116.288 86.233,115.951 86.233,115.052 86.55,114.735 87.923,114.735 R1.2
NetD4_A: D4.A R12.1 | length 2.9
  Top Layer w0.5: D4.A@60.706,80.391 R12.1
NetD5_2: D5.2 R15.2 | length 6
  Top Layer w0.5: D5.2@96.139,62.23 99.441,62.23 100.203,61.468 R15.2
NetD6_1: D6.1 K1.1 Q1.3 | length 16.4
  Top Layer w0.5: v2(104.287,55.646) Q1.3 102.108,54.483 104.902,51.689 D6.1
  Bottom Layer w0.5: v2(104.287,55.646) 107.188,58.547 K1.1@107.188,60.88
NetF1_2: F1.2 USB1.1 | length 5.1
  Top Layer w1: F1.2 61.721,87.757 61.965,88.001 61.965,89.937 USB1.1
NetF2_2: F2.2 USB1.5 | length 17.5
  Top Layer w1: USB1.5 62.195,98.667 62.195,100.295 62.992,101.092 74.217,101.092 74.802,100.506 74.802,99.472 75.233,99.041 75.865,99.041 75.945,98.961 F2.2
NetLS1_2: LS1.2 Q2.3 | length 8.7
  Top Layer w0.5: Q2.3 87.122,76.2 89.408,73.914 LS1.2@89.408,73.533
NetP1_1: P1.1 R11.2 R13.1 | length 83.6
  Top Layer w0.762: R11.2 v3(110.744,102.399)
  Top Layer w2.5: R13.1 120.587,105.244 v3(124.206,105.244)
  Bottom Layer w0.762: v3(110.744,102.399) 124.206,102.399
  Bottom Layer w2.5: P1.1@118.387,47.856 115.951,50.292 115.951,76.876 118.872,79.797 118.872,89.418 118.882,89.418 120.777,91.313 123.19,91.313 124.206,92.329 124.206,102.399 v3(124.206,105.244)
NetQ1_1: Q1.1 R15.1 | length 7
  Top Layer w0.5: v2(102.997,57.023) Q1.1@102.997,58.085 ; R15.1 v2(104.267,61.468)
  Bottom Layer w0.5: v2(102.997,57.023) 102.997,60.198 v2(104.267,61.468)
NetQ2_1: Q2.1 R36.2 | length 5.5
  Top Layer w0.5: v2(78.486,77.216) Q2.1@79.456,77.216 ; v2(78.867,79.883) R36.2 ; Q2.1 Q2.1@79.817,77.15
  Bottom Layer w0.5: v2(78.486,77.216) 78.486,79.502 v2(78.867,79.883)
NetR6_2: R6.2 U2.20 | length 8.8
  Top Layer w0.2: 88.761,83.935 88.519,83.693 88.519,82.931 89.084,82.366 89.084,78.857 89.201,78.74 89.672,78.74 89.916,78.984 R6.2
  Top Layer w0.279: 88.761,83.935 U2.20
NetR17_1: R17.1 R18.2 | length 2.7
  Top Layer w0.5: R17.1 R18.2
NetR18_1: R18.1 R19.2 | length 2.7
  Top Layer w0.5: R18.1 R19.2
NetR19_1: R19.1 R20.2 | length 2.5
  Top Layer w0.5: R19.1 R20.2@102.108,118.872
NetR25_1: R25.1 U4.1 | length 4.7
  Top Layer w0.5: R25.1 107.745,66.548 U4.1
NetR26_1: R26.1 U5.1 | length 2.9
  Top Layer w0.5: U5.1@117.348,75.692 R26.1
NetR27_1: R27.1 R29.1 U5.4 | length 7.1
  Top Layer w0.3: R29.1 103.267,75.614 R27.1 107.618,75.438 U5.4
NetR30_2: R30.2 U4.2 | length 4.7
  Top Layer w0.5: R30.2 107.745,64.008 U4.2
NetR33_1: R33.1 U8.1 | length 3.5
  Top Layer w0.762: U8.1 117.108,70.041 120.204,70.041 R33.1 120.267,70.102 R33.1@120.142,69.977
NetR34_1: R34.1 R35.1 U8.4 | length 7.3
  Top Layer w0.3: R35.1 103.267,70.153 R34.1 U8.4
NRST: C9.2 key1.2 P3.9 R10.1 U2.7 | length 78.1
  Top Layer w0.2: v1(53.34,76.327) 52.705,76.327 52.578,76.2 52.578,73.778 52.695,73.661 key1.2 ; U2.7 82.554,89.158 82.25,88.854 82.25,83.667 82.724,83.193 82.796,83.193 83.312,82.677 R10.1 83.677,81.136 84.163,81.136 84.4,80.899 84.608,80.899 84.844,81.136 85.36,81.136 C9.2
  Bottom Layer w0.2: P3.9 53.213,98.933 52.705,98.425 52.705,76.581 52.959,76.327 v1(53.34,76.327) 54.817,74.85 82.481,74.85 84.455,76.824 v1(84.455,80.645)
OSC_IN: C13.1 U2.5 Y1.1 | length 9.8
  Top Layer w0.203: Y1.1 81.497,91.948 81.751,91.694 81.751,90.334 81.926,90.16 ; 81.926,90.158 83.957,90.158 83.961,90.162 U2.5
  Top Layer w0.5: C13.1 78.605,93.226 Y1.1
OSC_OUT: C14.1 U2.6 Y1.2 | length 10.7
  Top Layer w0.2: 81.926,89.658 U2.6
  Top Layer w0.203: Y1.2 79.959,86.995 81.629,86.995 81.748,87.114 81.748,89.477 81.926,89.655
  Top Layer w0.5: C14.1 78.91,86.098 Y1.2
PF: U3.7 U8.2 | length 66.3
  Top Layer w0.3: U3.7 109.357,108 111.048,108 111.252,108.204 111.252,109.093 111.633,109.474 127.254,109.474 127.635,109.093 127.635,77.851 127.254,77.47 125.73,77.47 125.476,77.216 125.476,72.771 125.222,72.517 U8.2
PF_MCU: R35.2 U2.29 | length 24.8
  Top Layer w0.254: U2.29 93.333,88.658 93.557,88.434 93.557,85.217 94.027,84.747 94.843,84.747 95.135,84.455 95.135,73.267 95.504,72.898 v2(97.155,72.898) ; v2(100.568,72.882) 100.584,72.898 R35.2
  Bottom Layer w0.254: v2(97.155,72.898) 97.171,72.882 v2(100.568,72.882)
RX: R22.1 U3.8 U4.4 | length 72
  Top Layer w0.3: U3.8 109.293,109.36 110.568,109.36 110.744,109.536 110.744,109.855 110.978,110.089 127.909,110.089 128.27,109.728 128.27,77.47 127.635,76.835 126.365,76.835 126.111,76.581 126.111,70.231 124.333,68.453 120.777,68.453 120.396,68.072 120.396,66.676 120.395,66.675 U4.4
SCL1: R7.2 U2.42 | length 30.1
  Top Layer w0.2: R7.2 72.644,76.153 v5(72.644,76.2) ; U2.42 88.261,91.571 v1(88.519,91.313)
  Bottom Layer w0.2: v5(72.644,76.2) 77.665,81.221 80.744,81.221 81.444,81.921 86.656,81.921 87.376,82.641 87.376,89.154 88.519,90.297 v1(88.519,91.313)
SDA1: R8.2 U2.43 | length 36.8
  Top Layer w0.2: R8.2 v5(65.024,76.2) ; v1(87.376,91.186) 87.757,91.567 87.757,93.454 U2.43
  Bottom Layer w0.2: v5(65.024,76.2) 65.951,77.127 72.857,77.127 77.456,81.726 79.029,81.726 79.729,82.426 86.447,82.426 86.868,82.847 86.868,89.799 87.376,90.307 v1(87.376,91.186)
SPK: R36.1 U2.28 | length 19.6
  Top Layer w0.2: R36.1 80.391,81.153 v1(81.661,81.153) ; v1(90.17,88.158) U2.28
  Bottom Layer w0.2: v1(81.661,81.153) 83.977,81.153 84.166,81.342 87.099,81.342 87.595,80.845 88.173,80.845 88.581,81.253 88.581,82.358 87.996,82.943 87.996,87.869 88.265,88.138 v1@89.916,88.138
SWCLK: P3.7 U2.37 | length 43.1
  Top Layer w0.2: v4(90.679,97.409) 90.746,97.342 90.746,93.473 U2.37
  Bottom Layer w0.2: P3.7 78.105,93.853 78.105,96.52 78.994,97.409 v4(90.679,97.409)
SWDIO: P3.6 U2.34 | length 50.5
  Top Layer w0.3: U2.34 93.488,91.158 93.726,91.396 93.726,92.198 93.722,92.202 93.722,96.012 93.214,96.52 v4(92.061,96.52)
  Bottom Layer w0.3: P3.6 56.134,91.313 56.518,91.697 56.515,91.699 56.515,93.218 78.867,93.218 78.867,96.139 79.248,96.52 v4(92.061,96.52)
TX: U3.6 U5.2 | length 59
  Top Layer w0.3: U3.6 111.634,106.807 111.887,107.06 111.887,108.331 112.268,108.712 126.619,108.712 127,108.331 127,78.867 126.365,78.232 U5.2
USART1_RX: R29.2 U2.31 | length 20.6
  Top Layer w0.279: U2.31 94.111,89.658
  Top Layer w0.3: 94.111,89.658 94.615,89.154 94.615,86.352 94.869,86.098 96.274,86.098 96.647,85.725 96.647,78.359 97.028,77.978 R29.2
USART1_TX: R30.1 U2.30 | length 33.8
  Top Layer w0.279: U2.30 93.722,89.158
  Top Layer w0.3: 93.722,89.158 94.061,88.819 94.061,85.771 94.361,85.471 95.866,85.471 96.042,85.295 96.042,74.392 96.393,74.041 98.044,74.041 98.298,73.787 98.298,64.516 98.806,64.008 R30.1
USART2_RX: P3.3 U2.13 | length 31.3
  Top Layer w0.3: v2(84.328,84.709) 84.328,84.787 84.899,85.358 U2.13@85.217,85.358
  Bottom Layer w0.3: P3.3 55.626,84.709 v2(84.328,84.709)
USART2_TX: P3.4 U2.12 | length 30.4
  Top Layer w0.3: v2(83.566,85.471) U2.12@83.566,86.614
  Bottom Layer w0.3: P3.4 54.898,86.233 55.66,85.471 v2(83.566,85.471)
USART3_RX: M2.8 P4.2 U2.22 | length 58.2
  Top Layer w0.279: 89.761,84.074 U2.22
  Top Layer w0.3: 89.764,84.074 89.769,84.074 90.17,83.673 v1(90.17,82.931)
  Bottom Layer w0.3: P4.2 78.486,51.308 78.105,50.927 78.105,47.801 77.929,47.625 M2.8 74.471,47.625 74.295,47.801 74.295,57.023 74.1,57.218 74.1,72.923 74.867,73.69 83.182,73.69 85.922,76.431 85.922,76.651 90.17,80.899 v1(90.17,82.931)
USART3_TX: M2.1 P4.3 U2.21 | length 54.9
  Top Layer w0.279: v1@89.261,83.332 U2.21
  Top Layer w0.3: M2.1 73.025,54.151 73.201,53.975 76.962,53.975 77.47,53.467 77.47,49.079 77.781,48.768 P4.3 ; v1@89.261,83.332 v1(89.281,83.312)
  Bottom Layer w0.3: M2.1 73.025,73.787 73.533,74.295 82.711,74.295 89.281,80.865 v1(89.281,83.312)
WIFI_EN: M2.7 R37.1 U2.25 | length 54.2
  Top Layer w0.3: v1(74.847,60.452) R37.1 ; U2.25 92.065,86.658 92.075,86.648 v1(92.075,84.836)
  Bottom Layer w0.3: M2.7 76.708,50.165 76.962,50.419 76.962,57.99 76.786,58.166 75.101,58.166 74.847,58.42 v1(74.847,60.452) 74.847,72.815 75.117,73.085 83.432,73.085 86.527,76.18 86.527,76.28 89.622,79.375 91.694,79.375 92.075,79.756 v1(92.075,84.836)
pads on no net: M1.4 M2.2 M2.3 M2.6 U2.1 U2.2 U2.3 U2.4 U2.10 U2.14 U2.15 U2.16 U2.17 U2.19 U2.26 U2.27 U2.32 U2.33 U2.38 U2.39 U2.40 U2.45 U2.46 U7.0 U7.3 U7.4 USB1.0 USB1.2 USB1.3 USB1.6 USB1.7
copper on no net:
  other v1: 59.309,79.121

## Polygon pours and split planes (outlines as drawn)
DGND on Top Layer "Top Layer-DGND" (solid, pour order 70): 97.028,102.997 97.536,102.489 97.536,81.026 97.663,80.899 109.982,80.899 109.982,43.942 102.421,43.942 102.421,50.867 102.361,50.927 81.387,50.927 81.387,44.023 81.467,43.943 81.466,43.942 51.943,43.942 51.88,44.005 52.07,44.196 52.07,102.997
DGND on Top Layer "Top Layer-DGND 1" (solid, pour order 54): 39.751,103.378
DGND on Top Layer "Top Layer-No Net" (solid, shelved, pour order 40): 51.181,102.399 51.437,102.655 99.214,102.655 111.887,89.982 111.252,89.347 111.252,43.815 52.07,43.815 51.689,44.196
no net on Top Layer "NONET_L01_P010" (solid, remove dead copper, shelved, pour order 10): 74.979,101.963 94.41,101.963 94.41,80.5 74.979,80.5
no net on Top Layer "Keep-Out Layer-No Net" (solid, remove dead copper, shelved, pour order 14): 74.549,102.362 94.361,102.362 94.361,80.772 94.234,80.645 74.549,80.645
no net on Top Layer "Keep-Out Layer-No Net" (solid, remove dead copper, shelved, pour order 18): 73.406,101.092 94.615,101.092 94.615,78.615 73.793,78.615 73.407,78.232
no net on Top Layer "Keep-Out Layer-No Net" (solid, remove dead copper, shelved, pour order 22): 93.726,80.899 93.726,100.965 74.803,100.965 74.803,80.518
DGND on Bottom Layer "Bottom Layer-DGND" (solid, pour order 68): 52.008,102.997 97.282,102.997 97.282,81.026 109.982,81.026 109.982,43.942 102.421,43.942 102.421,50.8 102.294,50.927 81.534,50.927 81.467,50.994 81.467,43.943 51.943,43.943 51.943,102.932
DGND on Bottom Layer "Bottom Layer-DGND 2" (solid, pour order 62): 407.416,86.233
DGND on Bottom Layer "Bottom Layer-No Net" (solid, shelved, pour order 38): 51.944,102.489 52.071,102.616 99.441,102.616 112.014,90.043 111.506,89.535 111.506,43.942 51.562,43.942 51.435,43.815
DGND on Bottom Layer "Bottom Layer-No Net 1" (solid, shelved, pour order 36): 51.944,102.489 52.071,102.616 99.314,102.616 111.76,90.17 111.76,43.942 51.689,43.942 51.562,44.069
DGND on Bottom Layer "Bottom Layer-No Net 2" (hatched Horizontal grid 0.508 track 0.203, shelved, pour order 30): 1144.016,95.885
DGND on Bottom Layer "Bottom Layer-DGND 1" (solid, shelved, pour order 26): 996.95,110.363
no net on Bottom Layer "Keep-Out Layer-No Net" (solid, remove dead copper, shelved, pour order 8): 74.847,101.998 94.16,101.998 94.278,101.871 94.278,80.535 74.847,80.535
no net on Bottom Layer "Keep-Out Layer-No Net" (solid, remove dead copper, shelved, pour order 12): 74.549,102.362 94.361,102.362 94.361,80.645 74.549,80.645
no net on Bottom Layer "Keep-Out Layer-No Net" (solid, remove dead copper, shelved, pour order 16): 72.771,101.981 94.234,101.981 94.361,101.854 94.361,79.121 72.644,79.121
no net on Bottom Layer "NONET_L02_P020" (solid, remove dead copper, shelved, pour order 20): 74.803,100.965 93.726,100.965 93.726,80.899 74.803,80.899

## Keep-outs
Keep-Out Layer:
  lines w0.191: 51.943,45.847 ccw(c53.847,45.847) 53.847,43.943 ; 51.944,120.509 cw(c53.848,120.509) 53.848,122.413 ; 130.039,122.413 cw(c130.039,120.509) 131.943,120.509 ; 130.429,43.942 ccw(c130.429,45.466) 131.953,45.466
  lines w0.2: 51.943,45.847 51.943,120.509 ; 53.847,43.943 53.847,43.942 81.466,43.942 ; 53.848,122.413 130.039,122.413 ; 81.467,43.943 81.467,48.913 ; 102.421,48.913 102.421,43.942 130.429,43.942 ; 117.221,81.026 97.282,81.026 97.282,100.33 117.221,100.33 ; 131.943,45.466 131.943,120.509
  lines w0.254: 81.467,48.931 cw(c91.944,48.931) 102.421,48.931 ; 117.221,81.026 117.221,92.964 121.285,92.964 121.412,93.091 121.412,100.33 117.221,100.33

## Silkscreen, mask and mechanical layers (free items; w line width, h text height)
Top Overlay:
  text "AC~IN" at 121.666,120.396 h1
  text "NRST" at 56.642,99.695 h0.64 r270
  text "3V3" at 56.515,96.901 h0.64 r270
  text "CLK" at 56.515,94.615 h0.64 r270
  text "DIO" at 56.388,92.158 h0.64 r270
  text "GND" at 56.261,89.535 h0.64 r270
  text "TX" at 56.193,86.868 h0.64 r270
  text "RX" at 56.134,84.201 h0.64 r270
  text "SDA" at 56.193,82.042 h0.64 r270
  text "SCL" at 56.193,79.375 h0.64 r270
  text "3V3" at 78.105,53.086 h0.8 r90
  text "RX" at 78.232,50.8 h0.8 r90
  text "TX" at 78.232,48.133 h0.8 r90
  text "AC~OUT" at 125.73,45.339 h1
  text "GND" at 78.232,44.958 h0.8 r90
Bottom Overlay:
  text "wang.david.wei@scu.iot.lab" at 97.663,118.999 h1.52
  text "powerblade plus v3.0 2019.04.12" at 113.665,115.316 h1.52